# Altium PCB AMSController.PcbDoc (part 2 of 2)
Units mm, origin at the board's own origin, x right, y up, seen from the top; angles counter-clockwise.
Board outline 99 x 99 mm, 4 copper layers (Top Layer, Internal Plane 1, Internal Plane 2, Bottom Layer), stack 0.462 mm thick; 151 components, 144 nets, 493 pads, 128 vias.
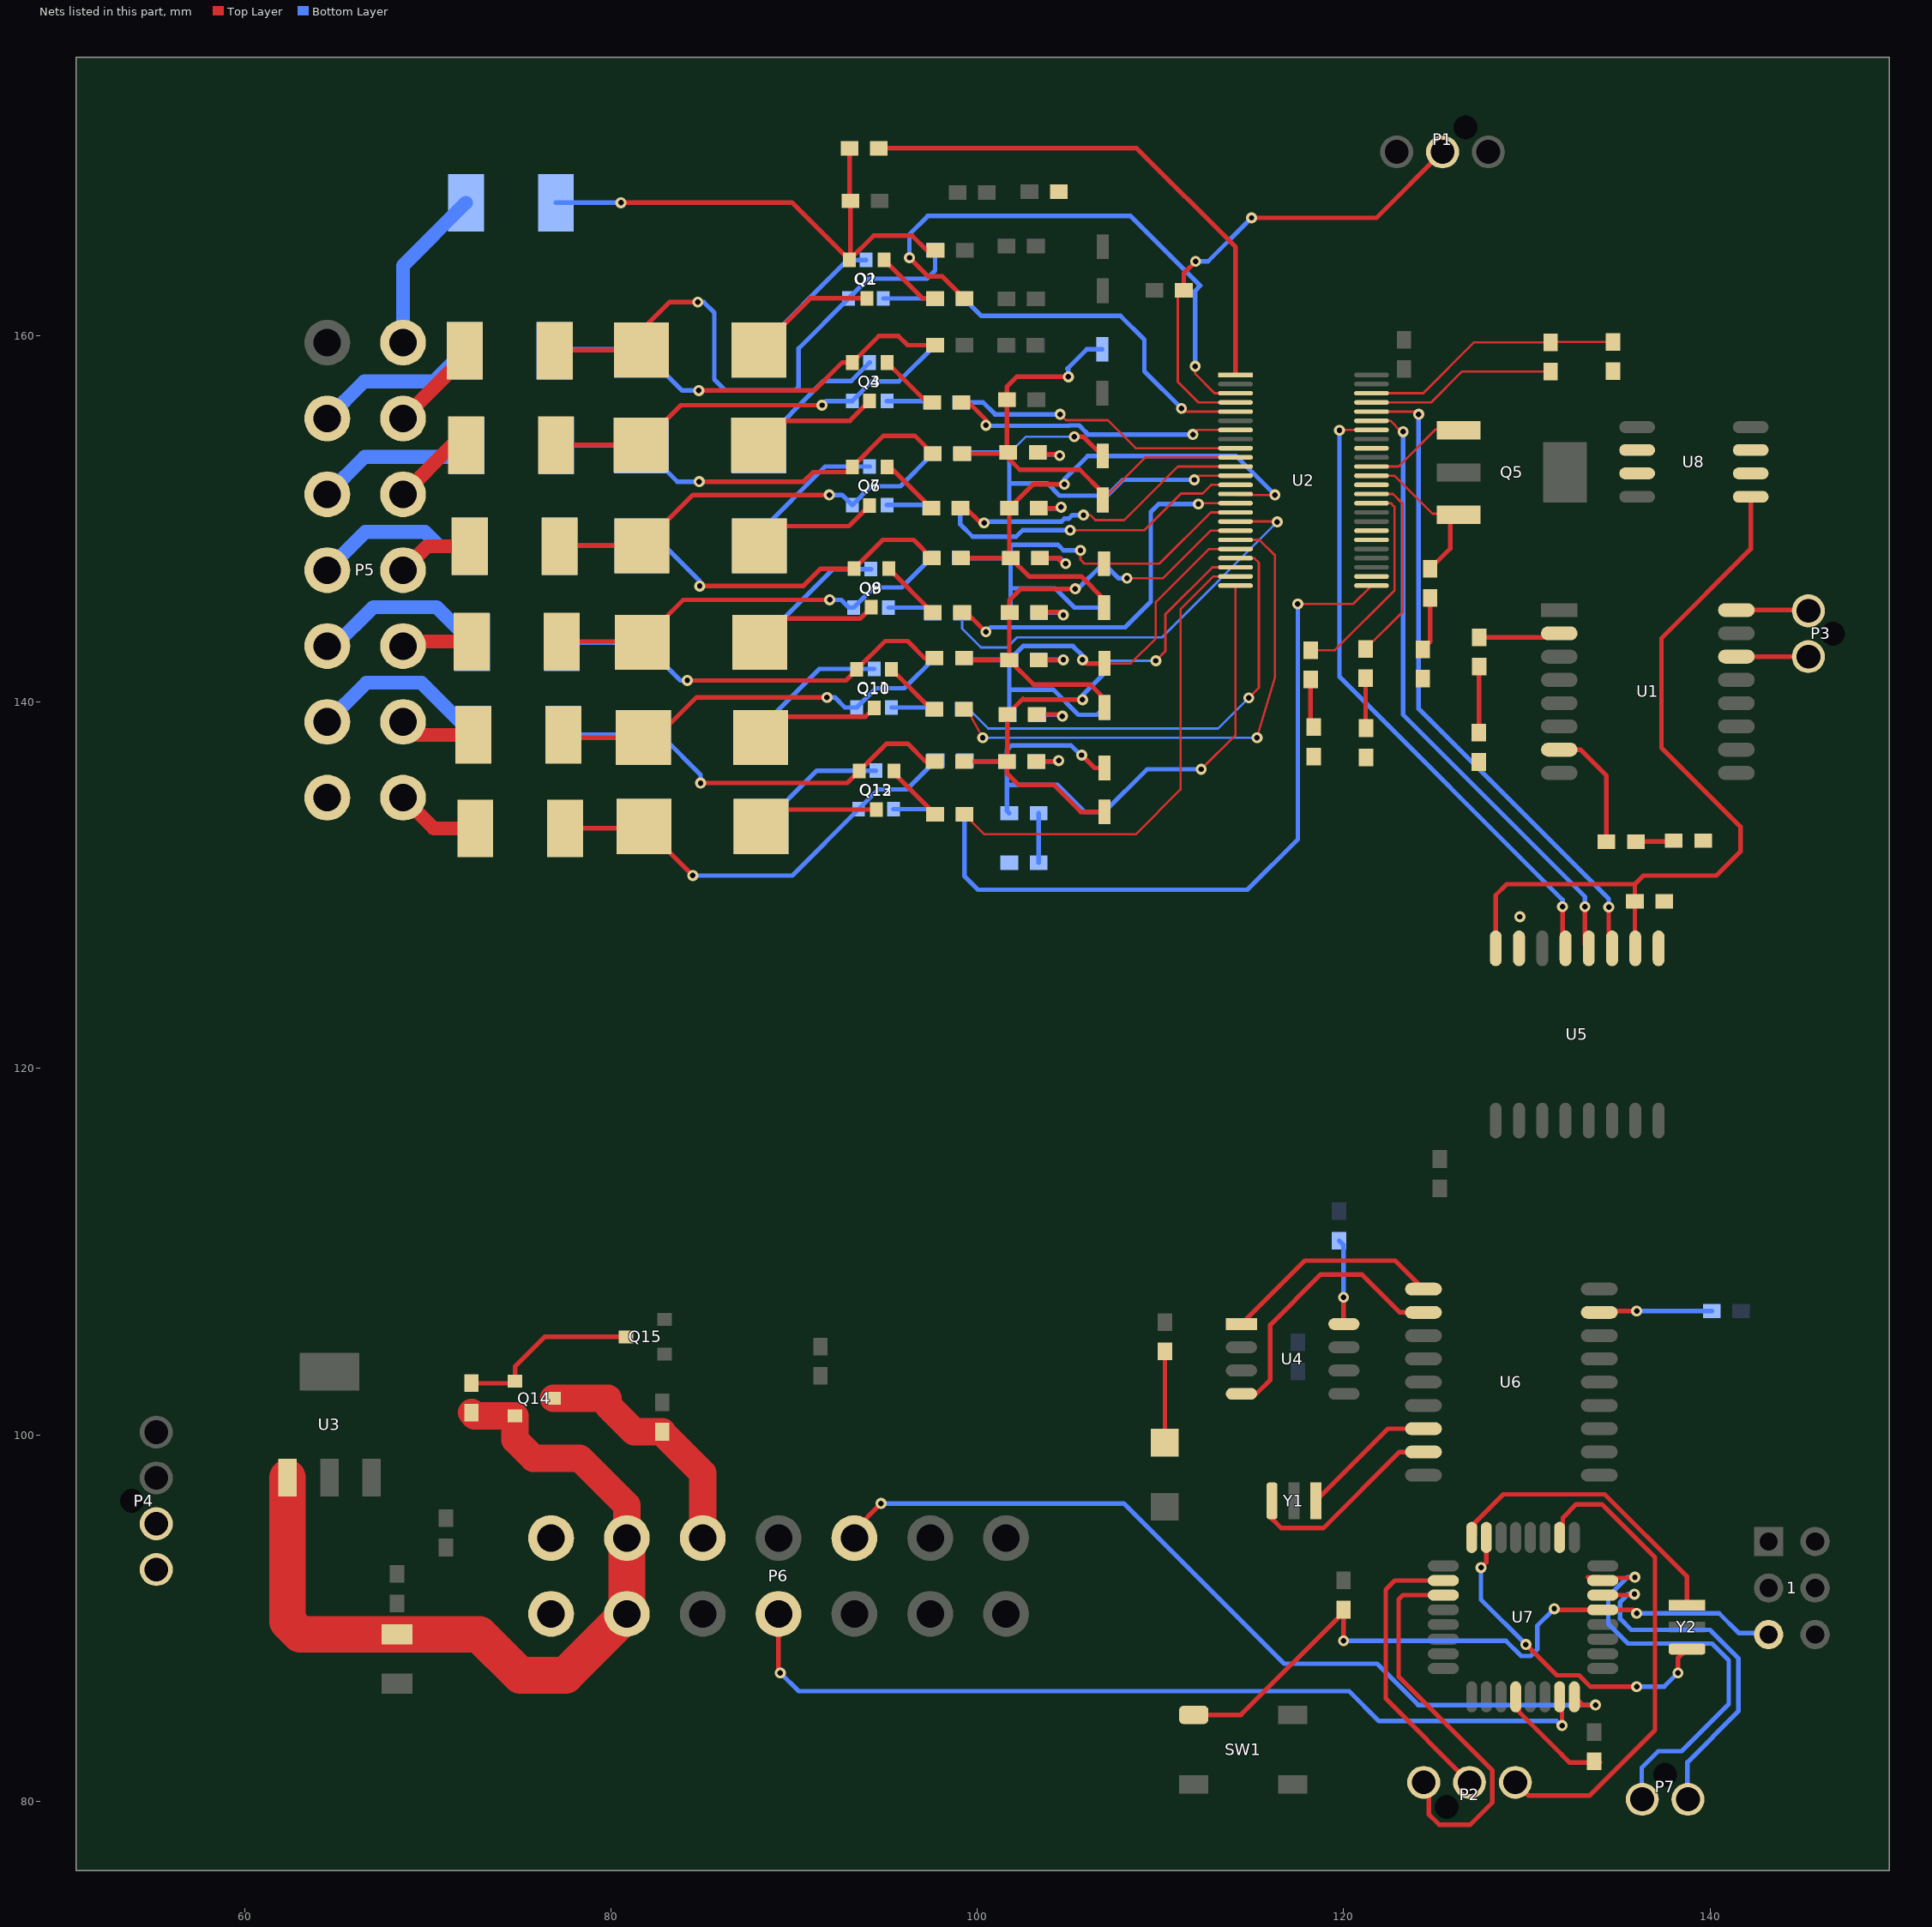
[diagram p4: the nets of this part, all layers, seen from the top]

## Via types
v1: diameter 0.6, hole 0.3, Top Layer to Bottom Layer, 120 vias
v2: diameter 6, hole 4, Top Layer to Bottom Layer, 4 vias
v3: diameter 3.87, hole 3.87, Top Layer to Bottom Layer, 4 vias

## Nets (pads, with @x,y where several pads share a name; then routed paths per layer and width w, separated by ;. In a path a pad name is that pad's centre, name@x,y a point inside that pad or via, vN(x,y) a via of type N, cw(c..) or ccw(c..) an arc to the next point about the centre after c; other vN are vias at no path point) (continued)
NetC9_2: C9.2 C16.1 D4.1 D5.2 R19.2 U2.10 | length 27.4
  Top Layer w0.127: D5.2@106.85,151.025 109.175,153.35 U2.10@114.1,153.35
  Top Layer w0.25: R19.2@99.175,153.55 101.625,153.55 C16.1@101.7,153.625 ; v1(104.975,157.75) 102.15,157.75 101.625,157.225 C9.2@101.625,156.5 101.625,153.7 C16.1@101.7,153.625 ; D5.2@106.85,151.025 106.85,151.425 105.6,152.675 102.325,152.675 101.7,153.3 C16.1@101.7,153.625
  Bottom Layer w0.25: v1(104.975,157.75) 104.975,158.15 104.925,158.2 105.975,159.25 D4.1@106.825,159.25
NetC11_1: C11.1 U1.2 | length 4.5
  Top Layer w0.25: C11.1@127.4,143.525 131.555,143.525 U1.2@131.775,143.745
NetC11_2: C11.2 C13.1 | length 3.6
  Top Layer w0.25: C13.1@127.375,138.325 127.4,138.35 C11.2@127.4,141.925
NetC12_1: C12.1 U1.7 | length 6.8
  Top Layer w0.25: U1.7@131.775,137.395 132.93,137.395 134.35,135.975 C12.1@134.35,132.375
NetC12_2: C12.2 C14.1 | length 2.1
  Top Layer w0.25: C12.2@135.95,132.375 137.975,132.375 C14.1@138.025,132.425
NetC15_1: C15.1 C16.2 | length 2.6
  Top Layer w0.25: C16.2@103.3,153.625 103.4,153.525 104.5,153.525 v1(104.5,153.45)
  Bottom Layer w0.25: C15.1@103.3,153.625 103.4,153.525 104.5,153.525 v1(104.5,153.45)
NetC15_2: C15.2 C24.1 D5.1 D6.2 R22.2 U2.12 | length 24.8
  Top Layer w0.127: v1(111.85,152.125) 112.075,152.35 U2.12@114.1,152.35
  Top Layer w0.25: v1(105.3,154.475) 105.8,154.475 D5.1@106.85,153.425
  Bottom Layer w0.127: C15.2@101.75,153.575 102.65,154.475 v1(105.3,154.475)
  Bottom Layer w0.25: R22.2@99.175,153.55 99.25,153.625 C15.2@101.7,153.625 101.75,153.575 101.75,151.925 ; C24.1@101.75,150.575 101.75,151.925 ; v1(111.85,152.125) 107.95,152.125 D6.2@106.85,151.025 106.618,151.257 104.496,151.257 103.825,151.929 103.825,151.925 101.75,151.925
NetC17_1: C17.1 U2.34 | length 11.8
  Top Layer w0.127: C17.1@118.2,142.825 119.525,142.825 122.775,146.075 122.775,150.65 122.575,150.85 U2.34@121.525,150.85
NetC17_2: C17.2 C20.1 | length 2.7
  Top Layer w0.25: C17.2@118.2,141.225 118.2,138.8 C20.1@118.375,138.625
NetC18_1: C18.1 U2.35 | length 10.7
  Top Layer w0.127: C18.1@121.2,142.9 123.225,144.925 123.225,150.825 122.7,151.35 U2.35@121.525,151.35
NetC18_2: C18.2 C21.1 | length 2.7
  Top Layer w0.25: C18.2@121.2,141.3 121.2,138.6 C21.1@121.225,138.575
NetC19_2: C19.2 C22.1 | length 3
  Top Layer w0.25: C22.1@124.325,142.875 124.725,143.275 C19.2@124.725,145.675
NetC23_1: C23.1 C24.2 | length 2.5
  Top Layer w0.25: C23.1@103.35,150.575 104.523,150.575 v1(104.58,150.632)
  Bottom Layer w0.25: C24.2@103.35,150.575 104.523,150.575 v1(104.58,150.632)
NetC23_2: C23.2 C26.1 D6.1 D7.2 R25.2 U2.14 | length 30.8
  Top Layer w0.127: U2.14@114.1,151.35 114.15,151.3 v1(116.25,151.3)
  Top Layer w0.25: R25.2@99.125,147.85 101.675,147.85 C26.1@101.75,147.925 ; v1(104.755,151.882) 103.057,151.882 C23.2@101.75,150.575 C26.1@101.75,147.925 ; D7.2@106.925,145.15 106.925,145.6 105.675,146.85 102.825,146.85 C26.1@101.825,147.85 C26.1@101.75,147.925
  Bottom Layer w0.25: v1(104.755,151.882) 104.755,152.145 104.75,152.15 106.025,153.425 D6.1@106.85,153.425 114.125,153.425 v1(116.25,151.3)
NetC25_1: C25.1 C26.2 | length 3.1
  Top Layer w0.25: C26.2@103.425,147.85 104.5,147.85 104.45,147.8 104.7,147.55 v1(104.825,147.55)
  Bottom Layer w0.25: C25.1@103.425,147.85 104.5,147.85 104.525,147.825 104.55,147.825 v1(104.825,147.55)
NetC25_2: C25.2 C28.1 D7.1 D8.2 R28.2 U2.16 | length 26.1
  Top Layer w0.127: v1(105.635,148.275) 105.635,147.765 105.85,147.55 D7.1@106.925,147.55 109.95,147.55 112.75,150.35 U2.16@114.1,150.35
  Bottom Layer w0.25: R28.2@99.1,147.875 99.125,147.85 C25.2@101.825,147.85 ; C28.1@101.775,144.875 101.825,144.925 101.825,146.2 ; v1(105.635,148.275) 104.711,148.275 104.411,148.575 101.925,148.575 101.825,148.475 C25.2@101.825,147.85 ; D8.2@106.925,145.15 105.3,145.15 104.25,146.2 101.825,146.2 ; 101.825,146.2 C25.2@101.825,147.85
NetC27_1: C27.1 C28.2 | length 2.8
  Top Layer w0.25: C27.1@103.375,144.9 104.55,144.9 v1(104.7,144.75)
  Bottom Layer w0.25: C28.2@103.375,144.875 104.575,144.875 v1(104.7,144.75)
NetC27_2: C27.2 C30.1 D8.1 D9.2 R31.2 U2.18 | length 26.9
  Top Layer w0.127: v1(108.175,146.75) 110.125,146.75 112.725,149.35 U2.18@114.1,149.35
  Top Layer w0.25: R31.2@99.275,142.4 99.395,142.28 C30.1@101.75,142.28 ; v1(105.35,146.175) 102.375,146.175 101.75,145.55 C30.1@101.75,142.28 ; D9.2@106.95,139.7 106.95,140.175 106.175,140.95 103.08,140.95 C30.1@101.75,142.28
  Bottom Layer w0.25: v1(105.35,146.175) 105.5,146.175 106.875,147.55 D8.1@106.925,147.55 107.725,146.75 v1(108.175,146.75)
NetC29_1: C29.1 C30.2 | length 2.7
  Top Layer w0.25: C30.2@103.35,142.28 104.68,142.28 v1(104.7,142.3)
  Bottom Layer w0.25: C29.1@103.35,142.3 v1(104.7,142.3)
NetC29_2: C29.2 C32.1 D9.1 D10.2 R34.2 U2.20 | length 28.4
  Top Layer w0.127: D9.1@106.95,142.1 108.375,142.1 109.75,143.475 109.75,145.45 112.65,148.35 U2.20@114.1,148.35
  Top Layer w0.25: v1(105.75,142.3) 105.95,142.1 D9.1@106.95,142.1
  Bottom Layer w0.25: R34.2@99.275,142.4 99.375,142.3 C29.2@101.75,142.3 ; C32.1@101.675,139.3 101.75,139.375 101.75,140.675 ; v1(105.75,142.3) 105.75,142.525 105.225,143.05 102.5,143.05 C29.2@101.75,142.3 ; D10.2@106.95,139.7 106.55,139.3 105.525,139.3 104.15,140.675 101.75,140.675 ; 101.75,140.675 C29.2@101.75,142.3
NetC31_1: C31.1 C32.2 | length 2.8
  Top Layer w0.25: C31.1@103.25,139.325 104.55,139.325 v1(104.65,139.225)
  Bottom Layer w0.25: C32.2@103.275,139.3 104.575,139.3 v1(104.65,139.225)
NetC31_2: C31.2 C34.1 D10.1 D11.2 R37.2 U2.22 | length 29.2
  Top Layer w0.127: v1(109.75,142.25) 110.275,142.775 110.275,144.788 112.837,147.35 U2.22@114.1,147.35
  Top Layer w0.25: R37.2@99.275,136.75 C34.1@101.625,136.75 ; v1(105.75,140.125) 102.55,140.125 102.5,140.175 C31.2@101.65,139.325 101.65,136.775 C34.1@101.625,136.75 ; D11.2@106.95,134 105.65,134 104.175,135.475 102.25,135.475 101.625,136.1 C34.1@101.625,136.75
  Bottom Layer w0.127: D10.1@106.95,142.1 107.1,142.25 v1(109.75,142.25)
  Bottom Layer w0.25: v1(105.75,140.125) 105.75,140.375 106.95,141.575 D10.1@106.95,142.1
NetC33_1: C33.1 C34.2 | length 2.5
  Top Layer w0.25: C34.2@103.225,136.75 104.4,136.75 v1(104.45,136.8)
  Bottom Layer w0.25: C33.1@103.225,136.75 104.4,136.75 v1(104.45,136.8)
NetC33_2: C33.2 C36.1 D11.1 D12.2 R40.2 U2.24 | length 34.7
  Top Layer w0.127: v1(112.225,136.325) 114.1,138.2 U2.24@114.1,146.35
  Top Layer w0.25: v1(105.7,137.1) 106.4,136.4 D11.1@106.95,136.4
  Bottom Layer w0.25: R40.2@99.325,136.8 99.375,136.75 C33.2@101.625,136.75 ; C36.1@101.75,133.925 101.625,134.05 101.625,135.475 ; v1(105.7,137.1) 105.65,137.1 105.125,137.625 101.875,137.625 101.625,137.375 C33.2@101.625,136.75 ; v1(112.225,136.325) 109.275,136.325 D12.2@106.95,134 105.85,134 104.375,135.475 101.625,135.475 ; 101.625,135.475 C33.2@101.625,136.75
NetC35_1: C35.1 C36.2 | length 2.7
  Bottom Layer w0.25: C35.1@103.35,131.225 C36.2@103.35,133.925
NetC41_1: C41.1 U7.20 | length 6.6
  Top Layer w0.25: U7.20@129.394,85.693 129.569,85.693 129.569,84.884 131.903,82.55 131.903,82.547 132.35,82.1 C41.1@134,82.1
NetD13_2: D13.2 R49.2 | length 5
  Top Layer w0.25: D13.2@110.236,99.568 110.25,99.582 R49.2@110.25,104.55
NetF1_1: F1.1 P5.14 | length 9.6
  Bottom Layer w0.25: P5.14@68.656,159.613 P5.14@69.069,159.2
  Bottom Layer w0.762: P5.14@68.656,159.613 68.656,163.816 F1.1@72.09,167.25
NetF1_2: F1.2 Q1.3 R1.1 R2.1 R3.1 | length 29
  Top Layer w0.25: v1(80.55,167.25) 89.907,167.25 Q1.3@93.025,164.132 Q1.3@93.075,164.182 ; R2.1@93.025,170.225 93.025,167.397 R1.1@93.075,167.347 Q1.3@93.075,164.182 ; R3.1@97.725,164.65 97.25,164.65 96.45,165.45 94.343,165.45 Q1.3@93.075,164.182
  Bottom Layer w0.25: F1.2@77,167.25 v1(80.55,167.25)
NetF2_1: F2.1 P5.12 | length 5.5
  Top Layer w0.25: P5.12@68.656,155.473 P5.12@68.656,155.856
  Top Layer w0.762: P5.12@68.656,155.473 72.025,158.842 F2.1@72.025,159.175
NetF2_2: F2.2 Q2.3 R5.1 R6.1 | length 32.2
  Top Layer w0.25: F2.2@76.91,159.2 81.65,159.2 81.112,159.737 83.2,161.825 v1(84.75,161.825)
  Bottom Layer w0.25: v1(84.75,161.825) 85.075,161.825 85.65,161.25 85.65,157.6 86.25,157 90.05,157 90.25,157.2 90.25,159.3 Q2.3@92.975,162.025 94.05,163.1 97.25,163.1 97.7,163.55 R6.1@97.7,164.675
NetF3_1: F3.1 P5.11 | length 9
  Bottom Layer w0.762: P5.11@64.516,155.473 66.543,157.5 70.34,157.5 F3.1@72.015,159.175
NetF3_2: F3.2 Q3.3 R9.1 R10.1 | length 23.2
  Top Layer w0.25: v1(84.8,157) 91.1,157 92.625,158.525 Q3.3@93.175,158.525 94.625,159.975 95.7,159.975 96.2,159.475 R10.1@97.7,159.475
  Bottom Layer w0.25: F3.2@76.925,159.175 77,159.25 81.65,159.25 83.9,157 v1(84.8,157)
NetF4_1: F4.1 P5.10 | length 4.5
  Top Layer w0.762: P5.10@68.656,151.333 71.348,154.025 F4.1@72.09,154.025
NetF4_2: F4.2 Q4.3 R12.1 R14.1 | length 23
  Top Layer w0.25: F4.2@77,154.025 R12.1@81.65,154.025 83.825,156.2 v1(91.525,156.2)
  Bottom Layer w0.25: v1(91.525,156.2) 91.75,156.425 Q4.3@93.175,156.425 94.25,157.5 95.725,157.5 R14.1@97.7,159.475
NetF5_1: F5.1 P5.9 | length 8.7
  Bottom Layer w0.762: P5.9@64.516,151.333 66.558,153.375 71.49,153.375 F5.1@72.115,154
NetF5_2: F5.2 Q6.3 R18.1 R19.1 | length 22.8
  Top Layer w0.25: v1(84.825,152.025) 90.525,152.025 91.05,152.55 92.9,152.55 Q6.3@93.175,152.825 94.875,154.525 96.6,154.525 R19.1@97.575,153.55
  Bottom Layer w0.25: F5.2@77.025,154 81.65,154 R18.1@81.675,153.975 83.625,152.025 v1(84.825,152.025)
NetF6_1: F6.1 P5.8 | length 4.2
  Top Layer w0.762: P5.8@68.656,147.193 69.963,148.5 F6.1@72.3,148.5
NetF6_2: F6.2 Q7.3 R21.1 R22.1 | length 24
  Top Layer w0.25: F6.2@78.01,147.7 F6.2@77.21,148.5 77.235,148.525 R21.1@81.7,148.525 84.475,151.3 v1(91.925,151.3)
  Bottom Layer w0.25: v1(91.925,151.3) 92.625,151.3 Q7.3@93.175,150.75 94.2,151.775 95.8,151.775 R22.1@97.575,153.55
NetF7_1: F7.1 P5.7 | length 9
  Bottom Layer w0.762: P5.7@64.516,147.193 66.598,149.275 69.85,149.275 70.625,148.5 F7.1@72.29,148.5
NetF7_2: F7.2 Q8.3 R24.1 R25.1 | length 22.9
  Top Layer w0.25: v1(84.85,146.325) 90.5,146.325 91.45,147.275 Q8.3@93.275,147.275 94.85,148.85 96.525,148.85 R25.1@97.525,147.85
  Bottom Layer w0.25: F7.2@77.2,148.5 77.225,148.525 R24.1@81.7,148.525 82.925,148.525 84.85,146.6 v1(84.85,146.325)
NetF8_1: F8.1 P5.6 | length 3.8
  Top Layer w0.762: P5.6@68.656,143.053 68.903,143.3 F8.1@72.4,143.3
NetF8_2: F8.2 Q9.3 R27.1 R28.1 | length 22.4
  Top Layer w0.25: F8.2@77.31,143.3 81.675,143.3 83.95,145.575 v1(91.95,145.575)
  Bottom Layer w0.25: v1(91.95,145.575) 92.575,145.575 93,145.15 Q9.3@93.25,145.15 94.35,146.25 95.875,146.25 R28.1@97.5,147.875
NetF9_1: F9.1 P5.5 | length 9.6
  Bottom Layer w0.762: P5.5@64.516,143.053 64.903,143.053 67.025,145.175 70.49,145.175 F9.1@72.415,143.25
NetF9_2: F9.2 Q10.3 R30.1 R31.1 | length 22.5
  Top Layer w0.25: v1(84.175,141.175) 92.825,141.175 Q10.3@93.425,141.775 94.975,143.325 96.2,143.325 97.125,142.4 R31.1@97.675,142.4
  Bottom Layer w0.25: F9.2@77.325,143.25 R30.1@81.725,143.25 83.8,141.175 v1(84.175,141.175)
NetF10_1: F10.1 P5.4 | length 4.1
  Top Layer w0.762: P5.4@68.656,138.913 69.369,138.2 F10.1@72.5,138.2
NetF10_2: F10.2 Q11.3 R33.1 R34.1 | length 22.6
  Top Layer w0.25: F10.2@77.41,138.2 77.56,138.05 R33.1@81.775,138.05 82.475,138.05 84.675,140.25 v1(91.8,140.25)
  Bottom Layer w0.25: v1(91.8,140.25) 92.225,140.25 92.775,139.7 Q11.3@93.425,139.7 94.475,140.75 96.025,140.75 R34.1@97.675,142.4
NetF11_1: F11.1 P5.3 | length 10
  Bottom Layer w0.762: P5.3@64.516,138.913 66.653,141.05 69.665,141.05 F11.1@72.49,138.225
NetF11_2: F11.2 Q12.3 R36.1 R37.1 | length 22.9
  Top Layer w0.25: v1(84.9,135.575) 92.9,135.575 Q12.3@93.55,136.225 95.05,137.725 96.2,137.725 97.175,136.75 R37.1@97.675,136.75
  Bottom Layer w0.25: F11.2@77.4,138.225 81.6,138.225 R36.1@81.775,138.05 82.875,138.05 84.9,136.025 v1(84.9,135.575)
NetF12_1: F12.1 P5.2 | length 4.6
  Top Layer w0.762: P5.2@68.656,134.773 70.329,133.1 F12.1@72.6,133.1
NetF12_2: F12.2 Q13.3 R39.1 R40.1 | length 24
  Top Layer w0.25: F12.2@77.51,133.1 81.7,133.1 R39.1@81.8,133.2 v1(84.475,130.525)
  Bottom Layer w0.25: v1(84.475,130.525) 89.9,130.525 Q13.3@93.525,134.15 94.6,135.225 96.15,135.225 R40.1@97.725,136.8
NetP1_2: P1.2 R7.2 U2.4 | length 26.5
  Top Layer w0.127: R7.2@111.275,162.475 110.95,162.15 110.95,157.475 112.075,156.35 U2.4@114.1,156.35
  Top Layer w0.25: R7.2@111.275,162.475 111.275,163.4 v1(111.925,164.05) ; v1(114.975,166.425) 121.8,166.425 P1.2@125.4,170.025
  Bottom Layer w0.25: v1(111.925,164.05) 112.6,164.05 v1(114.975,166.425)
NetP2_1: P2.1 U7.2 | length 26.5
  Top Layer w0.25: P2.1@129.373,81.026 130.099,80.3 133.425,80.3 137,83.875 137,93.3 134.1,96.2 132.7,96.2 131.969,95.469 131.969,94.568 U7.2@131.794,94.393
NetP2_2: P2.2 U7.10 | length 15.8
  Top Layer w0.25: U7.10@125.444,92.043 122.793,92.043 122.3,91.55 122.3,85.599 P2.2@126.873,81.026
NetP2_3: P2.3 U7.11 | length 21.8
  Top Layer w0.25: P2.3@124.373,81.026 124.648,80.751 124.648,79.282 125.219,78.711 126.907,78.711 128.125,79.929 128.125,81.675 123.007,86.793 123.007,91.007 123.243,91.243 U7.11@125.444,91.243
NetP3_1: P3.1 U1.16 | length 3.9
  Top Layer w0.25: U1.16@141.445,145.015 145.335,145.015 P3.1@145.375,144.975
NetP3_2: P3.2 U1.14 | length 3.9
  Top Layer w0.25: U1.14@141.445,142.475 P3.2@145.375,142.475
NetP4_1: P4.1 P4.2 P6.13 P6.14
NetP6_6: P6.6 U7.24 | length 47.4
  Top Layer w0.25: P6.6@93.294,94.361 93.294,94.794 v1(94.75,96.25) ; U7.24@132.594,85.693 133.037,85.25 v1(133.75,85.25)
  Bottom Layer w0.25: v1(94.75,96.25) 108,96.25 116.75,87.5 121.825,87.5 124.075,85.25 v1(133.75,85.25)
NetP6_7: P6.7 U7.23 | length 48.8
  Top Layer w0.25: P6.7@89.154,90.221 89.154,87.096 v1(89.25,87) ; U7.23@131.794,85.693 131.75,85.649 131.925,85.474 v1(131.925,84.125)
  Bottom Layer w0.25: v1(89.25,87) 90.25,86 120.3,86 121.925,84.375 131.625,84.375 131.875,84.125 v1(131.925,84.125)
NetP6_10: P6.10 Q14.1 R45.2 | length 13.6
  Top Layer w1.5: Q14.1@76.869,101.981 79.838,101.981 79.838,101.592 81.265,100.165 R45.2@82.804,100.165 82.804,100.115 85.014,97.905 P6.10@85.014,94.361
NetQ1_1: Q1.1 R5.2 | length 7.1
  Top Layer w0.25: R5.2@88.05,159.2 90.882,162.032 Q1.1@93.975,162.032
NetQ1_2: Q1.2 R4.1 | length 3.7
  Top Layer w0.25: Q1.2@94.943,164.15 Q1.2@94.925,164.132 97.032,162.025 R4.1@97.7,162.025
NetQ2_1: Q2.1 R9.2 | length 7.9
  Bottom Layer w0.25: R9.2@88.05,159.25 92.925,164.125 Q2.1@93.925,164.125
NetQ2_2: Q2.2 R8.1 | length 2.8
  Bottom Layer w0.25: Q2.2@94.875,162.025 97.675,162.025 R8.1@97.7,162
NetQ3_1: Q3.1 R12.2 | length 7.1
  Top Layer w0.25: R12.2@88.05,154.025 89.375,155.35 93.05,155.35 Q3.1@94.125,156.425
NetQ3_2: Q3.2 R11.1 | length 3.4
  Top Layer w0.25: Q3.2@95.075,158.525 97.25,156.35 R11.1@97.55,156.35
NetQ4_1: Q4.1 R18.2 | length 7.9
  Bottom Layer w0.25: R18.2@88.075,153.975 91.625,157.525 93.125,157.525 Q4.1@94.125,158.525
NetQ4_2: Q4.2 R17.1 | length 2.5
  Bottom Layer w0.25: Q4.2@95.075,156.425 97.45,156.425 R17.1@97.525,156.35
NetQ5_1: Q5.1 U2.38 | length 5.1
  Top Layer w0.127: U2.38@121.525,152.85 123,152.85 125.025,154.875 Q5.1@125.825,154.875
NetQ6_1: Q6.1 R21.2 | length 6.9
  Top Layer w0.25: R21.2@88.1,148.525 89.175,149.6 93,149.6 Q6.1@94.125,150.725
NetQ6_2: Q6.2 R20.1 | length 3.4
  Top Layer w0.25: Q6.2@95.075,152.825 95.25,152.825 R20.1@97.5,150.575
NetQ7_1: Q7.1 R24.2 | length 8.2
  Bottom Layer w0.25: R24.2@88.1,148.525 88.1,149.25 91.7,152.85 Q7.1@94.125,152.85
NetQ7_2: Q7.2 R23.1 | length 2.5
  Bottom Layer w0.25: Q7.2@95.075,150.75 97.3,150.75 R23.1@97.475,150.575
NetQ8_1: Q8.1 R27.2 | length 6.9
  Top Layer w0.25: R27.2@88.125,143.25 89.425,144.55 93.6,144.55 Q8.1@94.225,145.175
NetQ8_2: Q8.2 R26.1 | length 3.4
  Top Layer w0.25: Q8.2@95.175,147.275 97.55,144.9 R26.1@97.575,144.9
NetQ9_1: Q9.1 R30.2 | length 7.7
  Bottom Layer w0.25: R30.2@88.125,143.25 92.125,147.25 Q9.1@94.2,147.25
NetQ9_2: Q9.2 R29.1 | length 2.5
  Bottom Layer w0.25: Q9.2@95.15,145.15 97.275,145.15 R29.1@97.575,144.85
NetQ10_1: Q10.1 R33.2 | length 6.9
  Top Layer w0.25: R33.2@88.175,138.05 89.325,139.2 93.9,139.2 Q10.1@94.375,139.675
NetQ10_2: Q10.2 R32.1 | length 3.3
  Top Layer w0.25: Q10.2@95.325,141.775 97.5,139.6 R32.1@97.675,139.6
NetQ11_1: Q11.1 R36.2 | length 8.1
  Bottom Layer w0.25: R36.2@88.175,138.05 88.175,138.6 91.375,141.8 Q11.1@94.375,141.8
NetQ11_2: Q11.2 R35.1 | length 2.4
  Bottom Layer w0.25: Q11.2@95.325,139.7 97.55,139.7 R35.1@97.65,139.6
NetQ12_1: Q12.1 R39.2 | length 6.7
  Top Layer w0.25: R39.2@88.2,133.2 89.125,134.125 Q12.1@94.5,134.125
NetQ12_2: Q12.2 R38.1 | length 3.3
  Top Layer w0.25: Q12.2@95.45,136.225 95.45,136.125 R38.1@97.7,133.875
NetQ13_1: Q13.1 R42.2 | length 7.5
  Bottom Layer w0.25: R42.2@88.2,133.2 91.25,136.25 Q13.1@94.475,136.25
NetQ13_2: Q13.2 R41.1 | length 2.4
  Bottom Layer w0.25: Q13.2@95.425,134.15 97.425,134.15 R41.1@97.7,133.875
NetQ14_2: Q14.2 Q15.1 R43.1 | length 10
  Top Layer w0.25: R43.1@72.39,102.812 74.65,102.812 Q14.2@74.769,102.931 74.769,103.725 76.388,105.344 Q15.1@80.831,105.344
NetR2_2: R2.2 U2.1 | length 28.7
  Top Layer w0.25: R2.2@94.625,170.225 108.7,170.225 114.1,164.825 U2.1@114.1,157.85
NetR4_2: R4.2 U2.3 | length 30.6
  Top Layer w0.127: v1(111.9,158.325) 111.9,157.9 112.95,156.85 U2.3@114.1,156.85
  Top Layer w0.25: v1(96.3,164.25) 97.325,163.225 98.1,163.225 R4.2@99.3,162.025
  Bottom Layer w0.25: v1(96.3,164.25) 96.3,165.525 97.3,166.525 108.375,166.525 112.175,162.725 111.9,162.45 v1(111.9,158.325)
NetR8_2: R8.2 U2.5 | length 18.4
  Top Layer w0.127: v1(111.15,156.025) 111.325,155.85 U2.5@114.1,155.85
  Bottom Layer w0.25: R8.2@99.3,162 100.225,161.075 107.825,161.075 109.125,159.775 109.125,158.05 v1(111.15,156.025)
NetR11_2: R11.2 U2.7 | length 16
  Top Layer w0.127: v1(111.775,154.6) 112.025,154.85 U2.7@114.1,154.85
  Top Layer w0.25: R11.2@99.15,156.35 99.525,156.35 100.475,155.4 v1(100.475,155.1)
  Bottom Layer w0.25: v1(100.475,155.1) 100.5,155.075 105.016,155.075 105.041,155.1 105.559,155.1 105.925,154.734 105.925,154.725 106.05,154.6 v1(111.775,154.6)
NetR15_1: R15.1 U2.45 | length 10.5
  Top Layer w0.127: U2.45@121.525,156.35 124.775,156.35 126.454,158.029 R15.1@131.302,158.029
NetR15_2: R15.2 R16.1 U2.46 | length 14.3
  Top Layer w0.127: U2.46@121.525,156.85 124.35,156.85 127.129,159.629 R15.2@131.302,159.629 131.323,159.65 R16.1@134.7,159.65
NetR17_2: R17.2 U2.9 | length 16
  Top Layer w0.127: v1(104.525,155.7) 104.85,155.375 107.125,155.375 108.65,153.85 U2.9@114.1,153.85
  Bottom Layer w0.25: R17.2@99.125,156.35 100.325,156.35 100.975,155.7 v1(104.525,155.7)
NetR20_2: R20.2 U2.11 | length 17
  Top Layer w0.127: v1(105.8,150.2) 106.175,150.2 106.45,149.925 108.025,149.925 110.95,152.85 U2.11@114.1,152.85
  Top Layer w0.25: R20.2@99.1,150.575 99.375,150.575 100.175,149.775 v1(100.375,149.775)
  Bottom Layer w0.25: v1(100.375,149.775) 100.375,149.675 100.55,149.85 104.6,149.85 104.757,150.007 105.007,150.007 105.2,150.2 v1(105.8,150.2)
NetR23_2: R23.2 U2.13 | length 17.3
  Top Layer w0.127: v1(105.075,149.375) 109.125,149.375 111.125,151.375 112.3,151.375 112.775,151.85 U2.13@114.1,151.85
  Bottom Layer w0.25: R23.2@99.075,150.575 99.075,149.7 99.75,149.025 102.125,149.025 102.475,149.375 v1(105.075,149.375)
NetR26_2: R26.2 U2.15 | length 21.2
  Top Layer w0.127: v1(112.075,150.8) 112.125,150.85 U2.15@114.1,150.85
  Top Layer w0.25: R26.2@99.175,144.9 99.4,144.9 v1(100.475,143.825)
  Bottom Layer w0.25: v1(100.475,143.825) 100.725,144.075 108.075,144.075 109.475,145.475 109.475,150.375 109.9,150.8 v1(112.075,150.8)
NetR29_2: R29.2 U2.17 | length 23.6
  Top Layer w0.127: U2.17@114.1,149.85 116.35,149.85 v1(116.375,149.825)
  Bottom Layer w0.127: R29.2@99.175,144.85 99.175,144 100.2,142.975 101.625,142.975 102.175,143.525 110.075,143.525 v1(116.375,149.825)
NetR32_2: R32.2 U2.19 | length 29.5
  Top Layer w0.127: R32.2@99.275,139.6 99.45,139.6 v1(100.3,138.05) ; U2.19@114.1,148.85 115.4,148.85 116.25,148 116.25,141.335 v1(115.275,138.05)
  Bottom Layer w0.127: v1(100.3,138.05) v1(115.275,138.05)
NetR35_2: R35.2 U2.21 | length 25.7
  Top Layer w0.127: U2.21@114.1,147.85 115.125,147.85 115.375,147.6 115.375,140.775 v1(114.825,140.225)
  Bottom Layer w0.127: R35.2@99.25,139.6 99.547,139.6 100.597,138.55 113.15,138.55 v1(114.825,140.225)
NetR38_2: R38.2 U2.23 | length 26.8
  Top Layer w0.127: R38.2@99.3,133.875 100.4,132.775 108.65,132.775 111.1,135.225 111.1,145.05 112.9,146.85 U2.23@114.1,146.85
NetR41_2: R41.2 U2.25 | length 40.3
  Top Layer w0.127: v1(117.5,145.35) 120.525,145.35 U2.25@121.525,146.35
  Bottom Layer w0.25: R41.2@99.3,133.875 99.3,130.5 100.05,129.75 114.75,129.75 117.5,132.5 v1(117.5,145.35)
NetR46_1: R46.1 U4.8 | length 4.7
  Top Layer w0.25: v1(120,107.5) 120,106.066 U4.8@120.021,106.045
  Bottom Layer w0.25: R46.1@119.75,110.6 120,110.35 v1(120,107.5)
NetR48_1: R48.1 U6.17 | length 6.2
  Top Layer w0.25: U6.17@133.959,106.68 134.029,106.75 v1(136,106.75)
  Bottom Layer w0.25: v1(136,106.75) R48.1@140.1,106.75
NetU4_1: U4.1 U6.1 | length 12
  Top Layer w0.25: U4.1@114.421,106.045 117.876,109.5 122.809,109.5 U6.1@124.359,107.95
NetU4_4: U4.4 U6.2 | length 15.3
  Top Layer w0.25: U4.4@114.421,102.235 115.235,102.235 116,103 116,106 118.75,108.75 121,108.75 123.07,106.68 U6.2@124.359,106.68
NetU6_7: U6.7 Y1.3 | length 7.5
  Top Layer w0.25: Y1.3@118.491,96.393 122.428,100.33 U6.7@124.359,100.33
NetU6_8: U6.8 Y1.1 | length 11.2
  Top Layer w0.25: Y1.1@116.091,96.393 116.091,95.409 116.591,94.909 118.909,94.909 123.06,99.06 U6.8@124.359,99.06
NetU7_7: U7.7 Y2.1 | length 18.1
  Top Layer w0.25: v1(127.5,92.75) 127.794,93.044 U7.7@127.794,94.393 ; v1(129.95,88.55) 131.632,86.868 132.853,86.868 133.471,86.25 v1(136,86.25) ; v1(138.25,87) 138.25,87.8 Y2.1@138.75,88.3
  Bottom Layer w0.25: v1(127.5,92.75) 127.5,91 v1(129.95,88.55) ; v1(136,86.25) 137.5,86.25 v1(138.25,87)
NetU7_8: U7.8 Y2.3 | length 16.5
  Top Layer w0.25: U7.8@126.994,94.393 127.169,94.568 127.169,95.202 128.717,96.75 134.25,96.75 138.75,92.25 Y2.3@138.75,90.7
RBRB: C37.2 P6.11 P6.12 Q14.3 R43.2 U3.1 | length 46.3
  Top Layer w1.5: R43.2@72.39,101.212 72.571,101.031 Q14.3@74.769,101.031 74.769,99.729 75.78,98.718 78.307,98.718 80.874,96.151 P6.12@80.874,94.361
  Top Layer w2: U3.1@62.343,97.663 62.343,89.803 63.039,89.107 C37.2@68.326,89.107 72.818,89.107 75.057,86.868 77.521,86.868 P6.11@80.874,90.221 P6.12@80.874,94.361
RESET: 1.5 R50.1 SW1.1 U7.29 | length 38.5
  Top Layer w0.25: SW1.1@111.821,84.709 114.396,84.709 R50.1@120,90.313 ; R50.1@120,90.45 R50.1@120,90.313 ; v1@120.015,88.765 v1(120,88.75) R50.1@120,90.313 ; v1(131.5,90.5) 131.557,90.443 U7.29@134.144,90.443 135.807,90.443 v1(136,90.25) ; 1.5@143.38,89.25 1.5@143.46,89.17
  Bottom Layer w0.25: v1(120,88.75) 128.866,88.75 129.691,87.925 130.209,87.925 130.575,88.291 130.575,89.575 v1(131.5,90.5) ; v1(136,90.25) 140.5,90.25 141.58,89.17 1.5@143.46,89.17
RX: P7.2 U7.30 | length 19.8
  Top Layer w0.25: U7.30@134.144,91.243 135.818,91.243 v1(135.875,91.3)
  Bottom Layer w0.25: v1(135.875,91.3) 135.525,91.3 135.1,90.875 135.1,89.95 135.7,89.35 140,89.35 141.55,87.8 141.55,84.9 138.775,82.125 P7.2@138.775,80.16
SCK: U2.42 U5.13 | length 35.1
  Top Layer w0.127: v1(119.775,154.825) 119.8,154.85 U2.42@121.525,154.85
  Top Layer w0.25: v1(131.95,128.825) 131.95,126.715 U5.13@132.115,126.55
  Bottom Layer w0.25: v1(119.775,154.825) 119.775,141.375 131.95,129.2 v1(131.95,128.825)
SDI: U2.43 U5.12 | length 34.4
  Top Layer w0.127: U2.43@121.525,155.35 122.55,155.35 123.15,154.75 v1(123.25,154.75)
  Top Layer w0.25: v1(133.175,128.825) 133.175,126.76 U5.12@133.385,126.55
  Bottom Layer w0.25: v1(123.25,154.75) 123.25,139.3 133.175,129.375 v1(133.175,128.825)
SDO: U2.44 U5.11 | length 36.2
  Top Layer w0.127: U2.44@121.525,155.85 123.95,155.85 v1(124.1,155.7)
  Top Layer w0.25: v1(134.475,128.8) 134.475,126.73 U5.11@134.655,126.55
  Bottom Layer w0.25: v1(124.1,155.7) 124.1,139.625 134.475,129.25 v1(134.475,128.8)
TS-: C2.2 C13.2 C14.2 C20.2 C21.2 C22.2 C35.2 C42.1 D12.1 P5.1 R16.2 R42.1 U2.26 U2.30 U2.31 U2.36 U2.40 U5.9 U5.15 U8.2 U8.3 U8.6 U8.7
  other v1: 129.625,128.275
TS_5V: C42.2 U5.10 U5.16 U8.1 | length 43.9
  Top Layer w0.25: U5.16@128.305,126.55 128.305,129.455 128.9,130.05 135.9,130.05 ; U5.10@135.925,126.55 135.9,126.575 C42.2@135.9,129.116 135.9,130.05 ; U8.1@142.225,151.2 142.225,148.35 137.35,143.475 137.35,137.5 141.675,133.175 141.675,131.85 140.35,130.525 136.375,130.525 135.9,130.05
TX: P7.1 U7.31 | length 23.5
  Top Layer w0.25: 133.335,92.218 133.969,92.218 U7.31@134.144,92.043 ; U7.31@134.286,92.185 135.86,92.185 v1(135.9,92.225)
  Bottom Layer w0.25: v1(135.9,92.225) 135.506,92.225 134.45,91.169 134.45,89.675 135.525,88.6 140.114,88.6 141.025,87.689 141.025,85.3 138.45,82.725 137.175,82.725 136.275,81.825 P7.1@136.275,80.16
VREG: C19.1 Q5.3 U2.37 | length 8.6
  Top Layer w0.127: U2.37@121.525,152.35 122.775,152.35 124.85,150.275 Q5.3@125.825,150.275
  Top Layer w0.25: C19.1@124.725,147.275 125.825,148.375 Q5.3@125.825,150.275
pads on no net: P1.6 P2.6 P3.3 P4.6 P5.13 P7.3 Q5.4 SW1.2 SW1.3 U1.4 U1.5 U1.6 U1.8 U1.9 U1.10 U1.11 U1.12 U1.13 U1.15 U2.27 U2.28 U2.29 U2.32 U2.33 U2.39 U4.5 U6.3 U6.4 U6.5 U6.6 U6.10 U6.11 U7.12 U7.14 U7.19 U7.21 U7.22 U7.25 U7.26 U7.27 U7.28 U8.4 U8.5
copper on no net:
  other v2: 57.023,81.915 144.145,82.296 57.023,169.164 143.891,169.418
  other v3: 80.874,82.881 97.434,82.881 57.176,138.913 57.176,155.473

## Polygon pours and split planes (outlines as drawn)
GLV on Bottom Layer "Bottom Layer-GLV" (solid, pour order 62): 52.3,118.425 148.3,118.425 148.325,118.4 148.325,77.675 52.3,77.675 52.275,77.7 52.3,77.725
TS- on Bottom Layer "Bottom Layer-TS-" (solid, pour order 76): 52.25,173.75 148.3,173.75 148.35,173.7 148.35,125.375 52.275,125.375 52.25,125.35
NetP4_1 on Bottom Layer "Bottom Layer-TSMS" (solid, pour order 54): 55.075,96.05 77.65,96.05 77.65,88.975 77.575,88.9 55.075,88.9
TS- on Top Layer "Top Layer - TS-" (solid, pour order 80): 52.3,173.7 148.475,173.7 148.475,125.375 52.325,125.375 52.325,173.675
GLV on Top Layer "Top Layer-GLV" (solid, pour order 60): 52.3,118.425 148.3,118.425 148.325,118.4 148.325,77.675 52.325,77.675 52.3,77.7

## Keep-outs
Keep-Out Layer:
  lines w0.3: 52.1,77.5 148.75,77.5 148.75,173.9 52.1,173.9 52.1,77.5

## Silkscreen, mask and mechanical layers (free items; w line width, h text height)
Top Overlay:
  rectangle: 52.3,118.425 148.3,125.375
  text "TS" at 57.7,126.8 h1.52
  text "GLV" at 58,114.8 h1.52
  text "5V" at 148.325,94.175 h0.8 r90
  text "MISO" at 141.275,93.275 h0.8 r90
  text "MOSI" at 148.325,90.75 h0.8 r90
  text "SCK" at 141.35,90.625 h0.8 r90
  text "RST" at 141.375,87.975 h0.8 r90
  text "GLV" at 148.325,87.65 h0.8 r90
  text "Rx" at 138.025,82.8 h1.52
  text "Tx" at 134.675,82.675 h1.52

## Dimensions
52.1,77.5 to 148.75,77.5 on Mechanical 1
52.1,77.5 to 52.1,173.9 on Mechanical 1

## Text inside footprints (layer, text, board x,y; h text height)
P5: Top Overlay "To Board Edge" at 52.716,157.013 h1.52 r270
P6: Top Overlay "To Board Edge" at 79.334,78.421 h1.52